# Altium PCB PCB1.PcbDoc
Units mil, origin at the board's own origin, x right, y up, seen from the top; angles counter-clockwise.
Board outline 995 x 810 mil, 4 copper layers (Top Layer, Power, Gnd, Bottom Layer), stack 21.665 mil thick; 8 components, 10 nets, 47 pads, 10 vias.
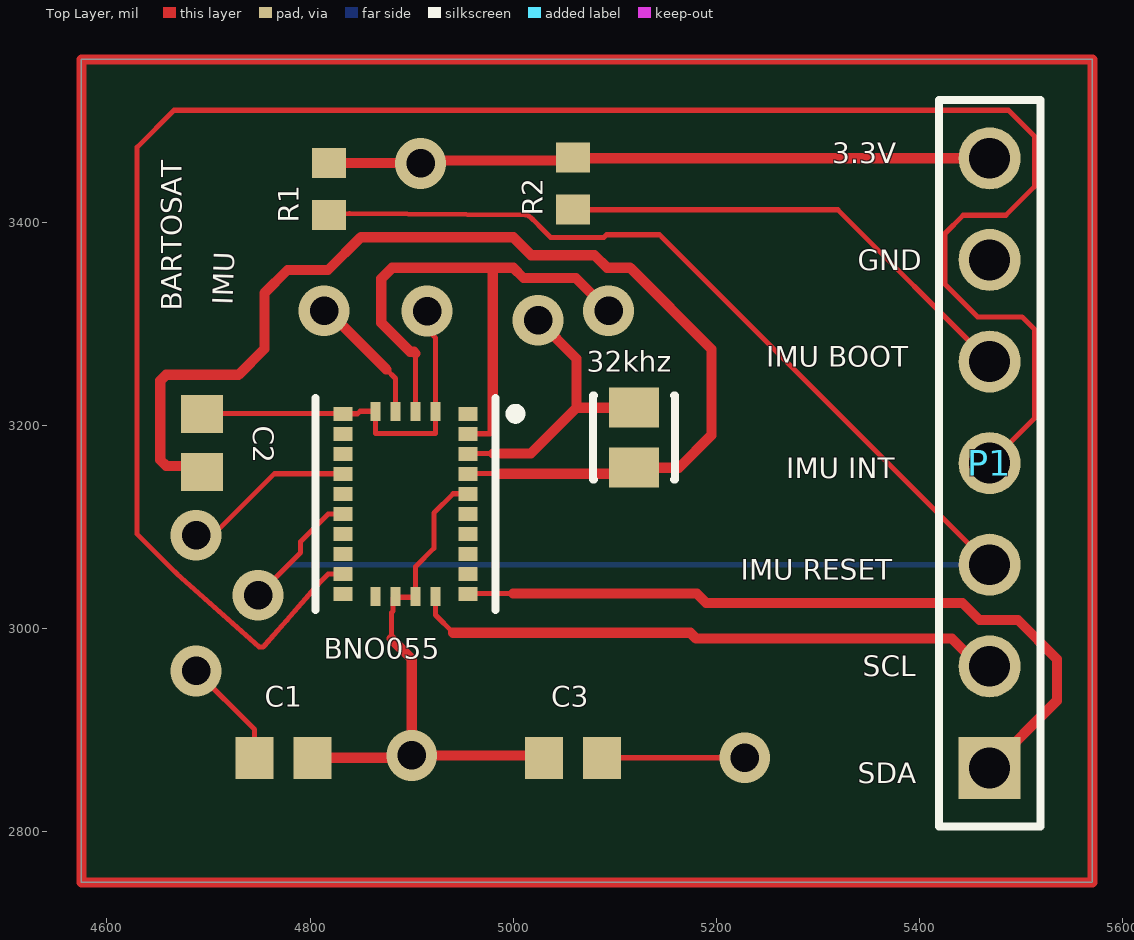
[diagram p0: Top Layer view]
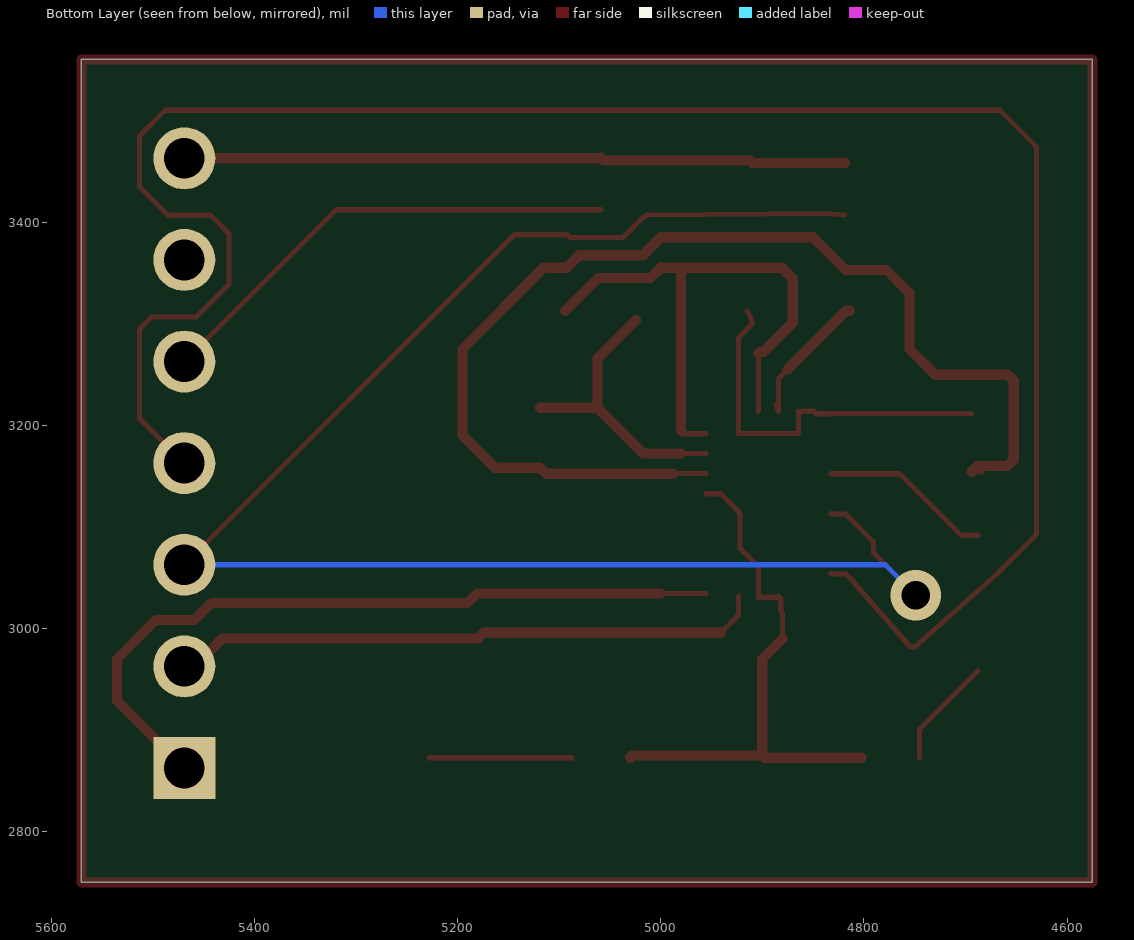
[diagram p1: Bottom Layer view, seen from below]
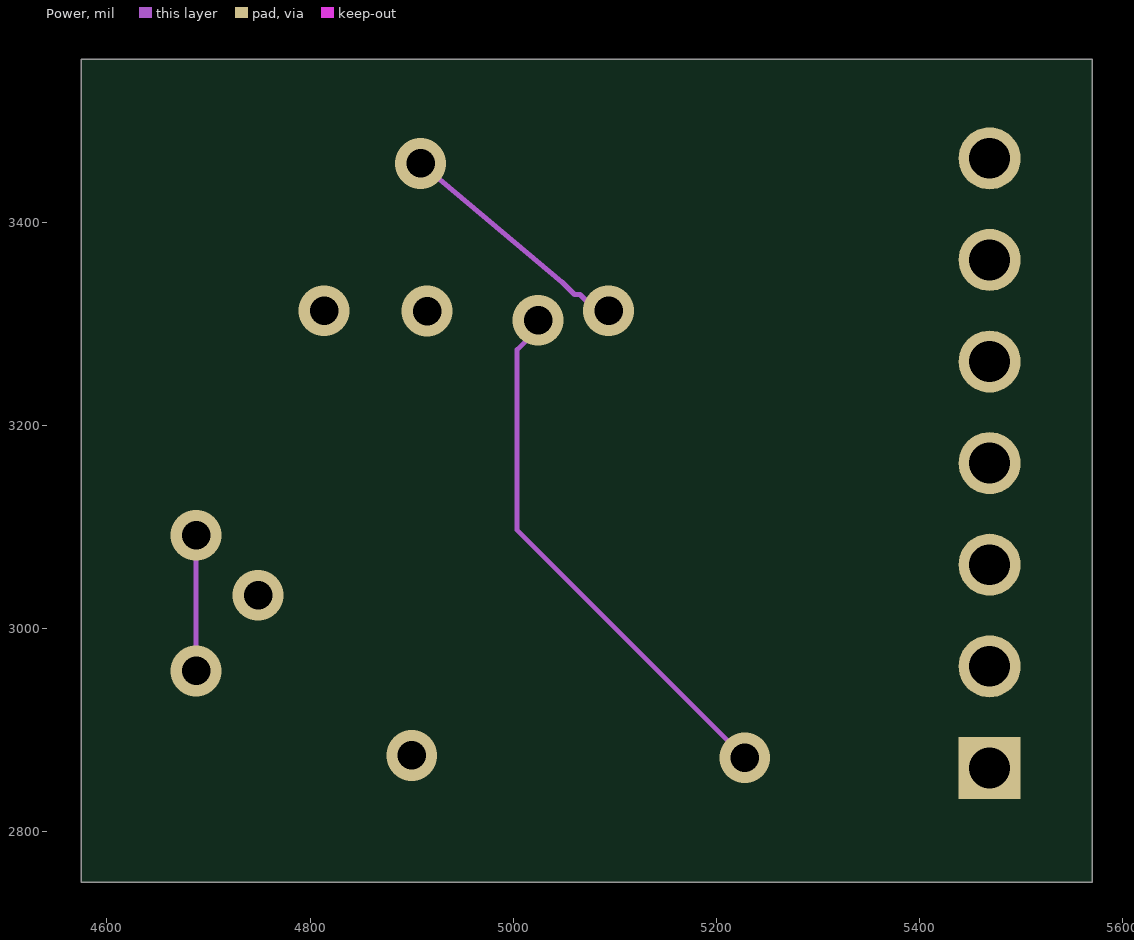
[diagram p2: Power]
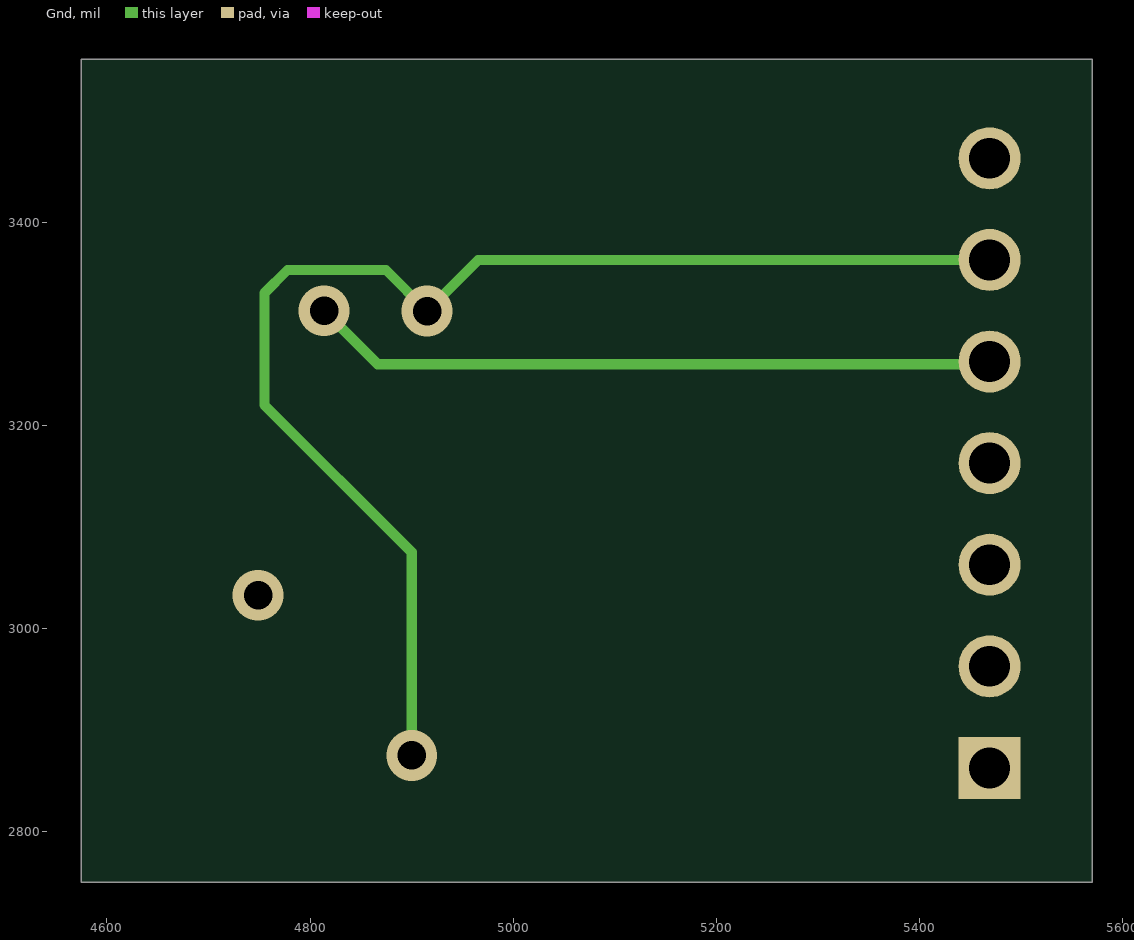
[diagram p3: Gnd]
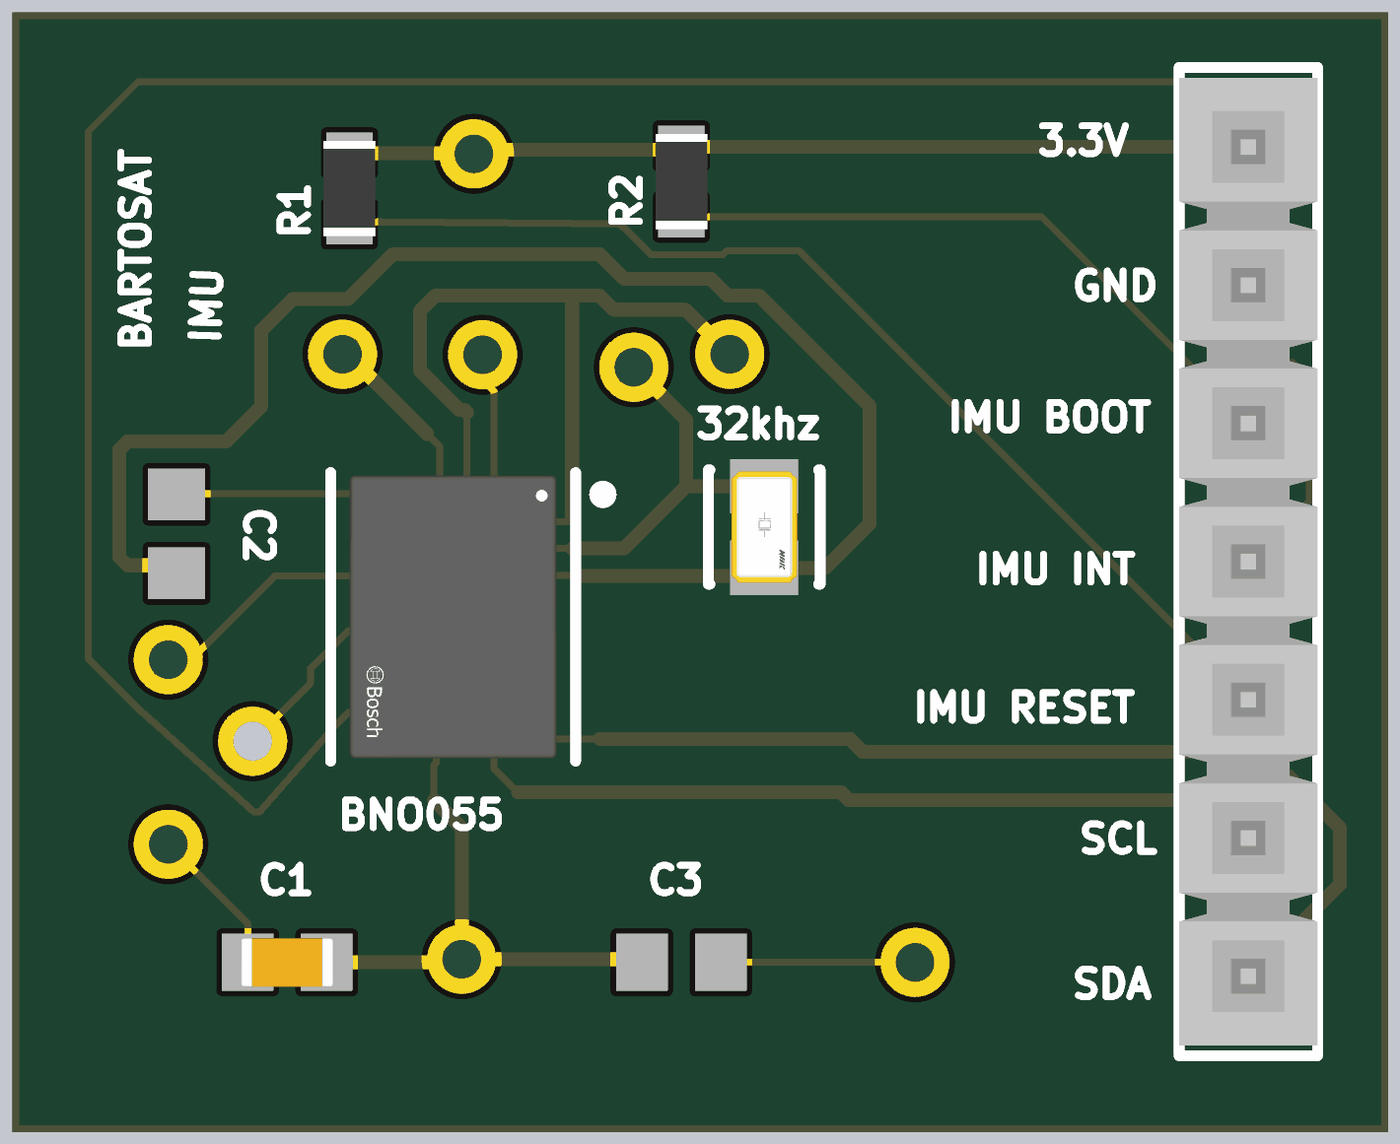
[diagram p4: 3D render of the assembled board from above, using the file's embedded part models]

## Layer stack, top to bottom
Top Solder: solder mask 0.4, Solder Resist, Dk 3.5
Top Layer: signal copper 0.3543
Dielectric 2: prepreg 2.8, PP-006, Dk 4.1
Power: signal copper 1.378
Dielectric 1: dielectric 12.6, FR-4, Dk 4.8
Gnd: signal copper 1.378
Dielectric 3: prepreg 2.8, PP-006, Dk 4.1
Bottom Layer: signal copper 0.3543
Bottom Solder: solder mask 0.4, Solder Resist, Dk 3.5

## Board outline
4575,2750 4575,3560 5570,3560 5570,2750

## Design rules (kind name [scope] priority, off if disabled: settings)
Clearance [All] p1: gap=10 ignorepadtopadclearanceinfootprint=TRUE except(0: Arc-Hole Track-Hole SMDPad-Hole THPad-Hole Via-Hole Fill-Hole Poly-Hole Region-Hole Text-Hole)
PolygonConnect [All] p1: connectstyle=Relief reliefconductorwidth=10 reliefentries=4 polygonreliefangle="90 Angle" airgapwidth=10
RoutingVias [All] p1: holewidth=28 width=50 viastyle="Through Hole" minholewidth=28 minwidth=50 maxholewidth=28 maxwidth=50
SolderMaskExpansion [All] p1: expansion=4 istentingtop=FALSE
Width [All] p1: maxlimit=10 minlimit=5 preferedwidth=5 checkconnectedcopper=TRUE
30 further rules are at their usual default settings.

## Components (designator, comment, footprint, x,y, rotation, side; value= is the part's Value field where it differs from the comment)
32khz "Oscillator" FP-NX2012SA-MFG 5118.82,3187.72 r90 top
BNO055 "BNO055" FP-BNO055-MFG 4893.82,3122.72 r0 top (schematic designator Bno)
C1 "100nF" CAPC1608X90X35ML10T15 4773.82,2872.72 r0 top
C2 "15pF" CAPC1608X90X35ML10T15 4693.82,3182.72 r270 top
C3 "15pF" CAPC1608X90X35ML10T15 5058.82,2872.72 r0 top
P1 "TSW-107-05-G-S" SMTC-TSW-107-05-X-S 5468.82,2862.72 r90 top
R1 "10k" RESC1609X55X30LL15T15 4818.82,3432.72 r90 top
R2 "10k" RESC1609X55X30LL15T15 5058.82,3437.72 r90 top

## Footprints (in the part's own frame and the unit in brackets; to place one, negate y for a bottom-side part, rotate by r counter-clockwise, add the part's x,y. Pads: shape width x height; smd on the part's side, far side on the other; paste and mask are expansions set on the pad)
CAPC1608X90X35ML10T15 [mm] "Chip Capacitor, 2-Leads, Body 1.7x0.9mm, IPC Low Density"
  rect 0.95x1.05 smd: 1(-0.725,0) 2(0.725,0)
  body extent -0.85,-0.45 0.85,0.45, height 0.9
FP-BNO055-MFG [mm]
  rect 0.475x0.35 smd paste+0 mask-1000: 1(1.563,2.25) 6(-1.563,2.25) 7(-1.563,1.75) 8(-1.563,1.25) 9(-1.563,0.75) 10(-1.563,0.25) 11(-1.563,-0.25) 12(-1.563,-0.75) 13(-1.563,-1.25) 14(-1.563,-1.75) 15(-1.563,-2.25) 20(1.563,-2.25) 21(1.563,-1.75) 22(1.563,-1.25) 23(1.563,-0.75) 24(1.563,-0.25) 25(1.563,0.25) 26(1.563,0.75) 27(1.563,1.25) 28(1.563,1.75)
  rect 0.25x0.475 smd paste+0 mask-1000: 2(0.75,2.313) 3(0.25,2.313) 4(-0.25,2.313) 5(-0.75,2.313) 16(-0.75,-2.313) 17(-0.25,-2.313) 18(0.25,-2.313) 19(0.75,-2.313)
  silkscreen extent -2.25,-2.65 2.88,2.65, body extent -2.45,-3.15 2.45,3.15, height 0.25
FP-NX2012SA-MFG [mm]
  rect 1x1.25 smd paste+0 mask+0: 1(-0.75,0) 2(0.75,0)
  silkscreen extent -1.05,-1.02 1.05,1.02, body extent -1.35,-0.72 1.35,0.72, height 0.25
RESC1609X55X30LL15T15 [mm] "Chip Resistor, 2-Leads, Body 1.75x0.95mm, IPC High Density"
  rect 0.75x0.85 smd: 1(-0.65,0) 2(0.65,0)
  body extent -0.87,-0.48 0.87,0.48, height 0.55
SMTC-TSW-107-05-X-S [mm] ".025 SQ Post Terminal Strip Assembly, 1x7 Pins, Vertical, 2.54mm Pitch, Male"
  rect 1.55x1.55 hole 1.02: 1(0,0)
  round 1.55 hole 1.02: 2(2.54,0) 3(5.08,0) 4(7.62,0) 5(10.16,0) 6(12.7,0) 7(15.24,0)
  silkscreen extent -1.46,-1.27 16.7,1.27, body extent -1.27,-1.27 16.51,1.27, height 5.21

## Part data
32khz: library part CMP-200220-000019-1, "CRYSTAL 32.7680KHZ 12.5PF SMD", Case/Package=SMD/SMT, ESR (Equivalent Series Resistance)=80kR, Frequency=32.768kHz, Frequency Tolerance=20ppm, Load Capacitance=12.5pF, Max Operating Temperature=85°C, Min Operating Temperature=-40°C, Height=0.024inch, Length=0.081inch, Mount="Surface Mount", Packaging="Cut Tape", RoHS Compliant=Yes, Series=NX2012SA, Width=0.047inch
BNO055: library part CMP-2000-05075-4, "IMU ACCEL/GYRO/MAG I2C 28LGA", Case/Package=LGA, Max Operating Temperature=85°C, Min Operating Temperature=-40°C, Lead Free="Lead Free", Mount="Surface Mount", Output Type=I2C, Packaging="Tape and Reel", Sensor Type=Accelerometer
C1: library part CMP-2100-03643-1, "Chip Capacitor, 0.1 uF, +/- 10%, 50 V, -55 to 125 degC, 0603 (1608 Metric), RoHS, Tape and Reel", Case Code (Imperial)=0603, Case Code (Metric)=1608, Dielectric=X7R, Dielectric Material=Ceramic, Insulation Resistance=10GR, Manufacturer=Murata, Max Operating Temperature=125degC, Min Operating Temperature=-55degC, Package Description="2-Pin Surface Mount Device, Body 1.6 x 0.8 mm", Package Quantity=1, Tolerance=10%, Voltage=50V, Capacitance=100nF, Case/Package=0603, Contact Plating=Tin, Datasheet URL=http://psearch.en.murata.com/capacitor/product/GRM188R71H104KA93%23.pdf, Datasheet Version=42675.0, Depth=0.8mm, Height=0.8mm, Lead Free=LeadFree, Length=1.6mm, Manufacturer URL=http://www.murata.com/, Material=Ceramic, Mount=SurfaceMount, Number of Pins=2, Package Reference=0603, Packaging=TapeandReel, Radiation Hardening=No, REACH SVHC=NoSVHC, RoHSCompliant=true, Termination=SMD/SMT, Thickness=0.035inch, Voltage Rating=50V, Voltage Rating (DC)=50V, Width=0.8mm
C2 C3: library part CMP-2006-02610-1, Manufacturer=Murata, Part Number=GRM1885C1H150JA01D
P1: library part CMP-1024-00400-1, "0.025\" SQ Post Header, Through-hole, Vertical, -55 to 125 degC, 2.54 mm Pitch, 7-Pin, Male, RoHS", Manufacturer=Samtec, Temperature Range="-55 to 125 degC", ComponentLink1Description="Manufacturer URL", ComponentLink1URL=http://www.samtec.com, ComponentLink2Description=Datasheet, ComponentLink2URL=http://www.samtec.com/documents/webfiles/pdf/TSW_TH.PDF, ComponentLink3Description="Package Specification", ComponentLink3URL=http://www.samtec.com/documents/webfiles/cpdf/TSW-XXX-XX-XXX-X-XX-XXX-MKT.pdf, DatasheetVersion=F-214, Mounting Technology=Through-hole, Orientation=Vertical, PackageDescription=".025[0.64] SQ. Post Terminal Strip Assembly", PackageReference=TSW-107-05-X-S, PackageVersion="DM, 8/1988", PartNumber=TSW-107-05-G-S, Pitch="2.54 mm", RoHS=True
R1 R2: library part CMP-1012-00623-3, "Chip Resistor, 10 KOhm, +/- 1%, 0.1 W, -55 to 155 degC, 0603 (1608 Metric), RoHS, Tape and Reel", Case Code (Imperial)=0603, Case Code (Metric)=1608, Manufacturer=Panasonic, Max Operating Temperature=155degC, Max Power Dissipation=100mW, Min Operating Temperature=-55degC, Package Description="2-Pin Surface Mount Device, Body 1.6 x 0.85 mm", Package Quantity=1, Package Reference=603, Resistance=10KOhm, Temperature Coefficient=100ppm\/degreesC, Tolerance=1%, Voltage Rating=75V, Case\/Package=0603, Composition=ThickFilm, Contact Plating=Tin, Datasheet URL=https://industrial.panasonic.com/cdbs/www-data/pdf/RDA0000/AOA0000C304.pdf, Datasheet Version=02/2017, Depth=0.8mm, Height=0.45mm, Lead Free=LeadFree, Length=1.6mm, Manufacturer URL=http://www.panasonic.com/, Military Standard=Not, Mount=SurfaceMount, Mounting Technology=SurfaceMount, Number of Pins=2, Number of Terminations=2, Packaging=TapeandReel, Power Rating=100mW, Radiation Hardening=No, REACH SVHC=NoSVHC, RoHSCompliant=true, Termination=SMD/SMT, Voltage Rating (DC)=75V, Width=0.031inch

## Via types
v1: diameter 50, hole 28, Top Layer to Power, 6 vias
v2: diameter 50, hole 28, Top Layer to Gnd, 3 vias
v3: diameter 50, hole 28, Top Layer to Bottom Layer, 1 vias

## Nets (pads, with @x,y where several pads share a name; then routed paths per layer and width w, separated by ;. In a path a pad name is that pad's centre, name@x,y a point inside that pad or via, vN(x,y) a via of type N, cw(c..) or ccw(c..) an arc to the next point about the centre after c; other vN are vias at no path point)
+5: BNO055.3 BNO055.28 P1.7 R1.2 R2.2 | length 1470.6
  Top Layer w5: BNO055.3 4903.83,3213.93 4903.83,3270.61 ; BNO055.28 4976.89,3191.61 4979.82,3194.54
  Top Layer w10: R1.2 4819.11,3458.01 4908.52,3458.01 v1(4908.82,3457.72) 4911.61,3460.51 5056.02,3460.51 R2.2 5059.41,3462.72 P1.7 ; 4903.83,3270.61 4902.07,3272.36 4898.54,3272.36 4870,3300.9 4870,3344.14 4880.86,3355 4980,3355 ; 4979.82,3194.54 4979.82,3354.82 4980,3355 ; v1(5093.82,3312.72) 5061.53,3345 5010,3345 5000,3355 4980,3355
  Power w5: v1(4908.82,3457.72) 5047.86,3340.93 5048.06,3340.93 5060.3,3328.69 5065.67,3328.69 5081.64,3312.72 v1(5093.82,3312.72)
GND: BNO055.2 BNO055.5 BNO055.6 BNO055.17 BNO055.18 BNO055.25 C1.2 C2.1 C3.1 P1.6 | length 2204.2
  Top Layer w5: C2.1 4693.82,3211.72 4831.88,3211.72 BNO055.6 4846.82,3211.3 4849.28,3213.76 BNO055.5 4864.29,3191.72 4923.35,3191.72 BNO055.2 4923.35,3286.01 4910.28,3299.07 4910.28,3303.22 4913.71,3310.57 v2(4915.11,3312.36) ; 4880,2990 4880,3015.43 4881.71,3017.14 4881.71,3029.41 BNO055.17 ; BNO055.17@4883.98,3030.72 4903.66,3030.72 BNO055.18 4903.66,3060.72 4921.82,3078.87 4921.82,3113.56 4940.82,3132.56 BNO055.25
  Top Layer w10: C1.2 4897.72,2872.72 v2(4900,2875) ; 4880,2990 4900,2970 v2(4900,2875) ; C3.1 5027.99,2875 v2(4900,2875)
  Gnd w10: v2(4900,2875) 4900,3075 4755,3220 4755,3330 4777.72,3352.72 4874.75,3352.72 v2(4915.11,3312.36) 4965.47,3362.72 P1.6
IMU_BOOT_LOAD: BNO055.4 P1.5 R2.1 | length 1287.1
  Top Layer w5: 4875,3255 4883.98,3246.02 BNO055.4 4885.99,3219.85 BNO055.4@4886.24,3220.61 ; R2.1 5319.41,3412.13 P1.5
  Top Layer w10: v2(4813.82,3312.72) 4817.28,3312.72 4875,3255
  Gnd w10: v2(4813.82,3312.72) 4866.53,3260 5466.1,3260 P1.5
IMU_INT: BNO055.14 P1.4 | length 2031.3
  Top Layer w5: BNO055.14 4825.45,3053.52 4817.77,3053.52 4810.45,3046.2 4777.04,3008.02 4755.32,2983.21 4753.74,2981.62 4749.76,2981.62 4668.82,3053.82 4668.72,3053.92 4667.35,3055.28 4629.82,3092.82 4629.82,3473.72 4666.1,3510 5487.53,3510 5512.82,3484.72 5512.82,3434.72 5484.82,3406.72 5442.82,3406.72 5424.82,3388.72 5424.82,3338.72 5456.82,3306.72 5500.82,3306.72 5512.82,3294.72 5512.82,3206.72 P1.4
IMU_RESET: BNO055.11 P1.3 R1.1 | length 1650.2
  Top Layer w5: v3(4748.82,3032.72) 4790.65,3074.54 4790.65,3085.45 4817.77,3112.58 4832.01,3112.58 BNO055.11 ; R1.1 4832.87,3408.09 4838.59,3408.47 5011.92,3407.13 5013.69,3407.13 5015.05,3406.01 cw(c5011.9,3402.13) 5015.09,3405.97 5017.67,3403.85 5019.06,3402.76 5029.55,3392.26 5029.59,3392.18 5036.91,3384.86 5089.15,3384.86 5091.79,3387.5 5144.04,3387.5 5146.67,3384.86 P1.3
  Bottom Layer w5: v3(4748.82,3032.72) 4778.82,3062.72 P1.3
Net32khz_1: 32khz.1 BNO055.26 C2.2 | length 1153.5
  Top Layer w5: C2.2@4683.82,3154.17 C2.2 ; BNO055.26 4955.63,3152.54 4987.32,3152.54 4987.63,3152.22
  Top Layer w10: C2.2 4687.99,3160 4658.34,3160 4652.48,3165.86 4652.48,3243.79 4658.34,3249.65 4729.65,3249.65 4755,3275 4755,3330 4777.72,3352.72 4817.72,3352.72 4850,3385 5000,3385 5017.64,3367.36 5080,3367.36 5092.36,3355 5115,3355 5195,3275 5195,3190 5163.19,3158.19 32khz.1 5112.85,3152.22 4987.63,3152.22
NetBno_9: BNO055.9 C1.1 | length 412.4
  Top Layer w5: v1(4687.82,2958.17) 4745.27,2900.72 C1.1 ; v1(4687.82,3091.72) 4704.29,3091.72 4764.82,3152.24 BNO055.9
  Power w5: v1(4687.82,2958.17) v1(4687.82,3091.72)
SCL: BNO055.19 P1.2 | length 584.9
  Top Layer w5: BNO055.19 4923.35,3013.19 4940.82,2995.72
  Top Layer w10: 4940.82,2995.72 5174.28,2995.72 5180,2990 5431.74,2990 5459.02,2962.72 P1.2
SDA: BNO055.20 P1.1 | length 741.2
  Top Layer w5: BNO055.20 4955.63,3034.43 5000,3034.43
  Top Layer w10: 5000,3034.43 5180.57,3034.43 5190,3025 5442.17,3025 5458.94,3008.23 5496.77,3008.23 5535,2970 5535,2928.9 P1.1
Xin32: 32khz.2 BNO055.27 C3.2 | length 956.3
  Top Layer w5: BNO055.27 4955.63,3172.22 4980,3172.22 ; C3.2 v1(5227.82,2872.72)
  Top Layer w10: 4980,3172.22 5017.22,3172.22 5062.24,3217.24 ; v1(5024.44,3303.3) 5062.24,3265.5 5062.24,3217.24 ; 32khz.2 5062.24,3217.24
  Power w5: v1(5024.44,3303.3) 5024.44,3295.05 5003.82,3274.43 5003.82,3096.72 v1(5227.82,2872.72)
pads on no net: BNO055.1 BNO055.7 BNO055.8 BNO055.10 BNO055.12 BNO055.13 BNO055.15 BNO055.16 BNO055.21 BNO055.22 BNO055.23 BNO055.24
copper on no net: | length 3610
  Top Layer w10: 4575,2750 5570,2750 5570,3560 4575,3560 4575,2750

## Silkscreen, mask and mechanical layers (free items; w line width, h text height)
Top Overlay:
  text "3.3V" at 5313.82,3457.72 h20
  text "GND" at 5338.82,3352.72 h20
  text "IMU" at 4723.99,3317.88 h20 r88.09
  text "BARTOSAT" at 4673.82,3312.72 h20 r90
  text "IMU BOOT" at 5248.82,3257.72 h20
  text "IMU INT" at 5268.82,3147.72 h20
  text "IMU RESET" at 5223.82,3047.72 h20
  text "SCL" at 5343.82,2952.72 h20
  text "SDA" at 5338.82,2847.72 h20